# Altium PCB Test_disposable.PcbDoc
Units mm, origin at the board's own origin, x right, y up, seen from the top; angles counter-clockwise.
Board outline 107.92 x 107.82 mm, 2 copper layers (Component Side, Bottom Layer), stack 1.571 mm thick; 10 components, 79 nets, 184 pads, 80 vias.
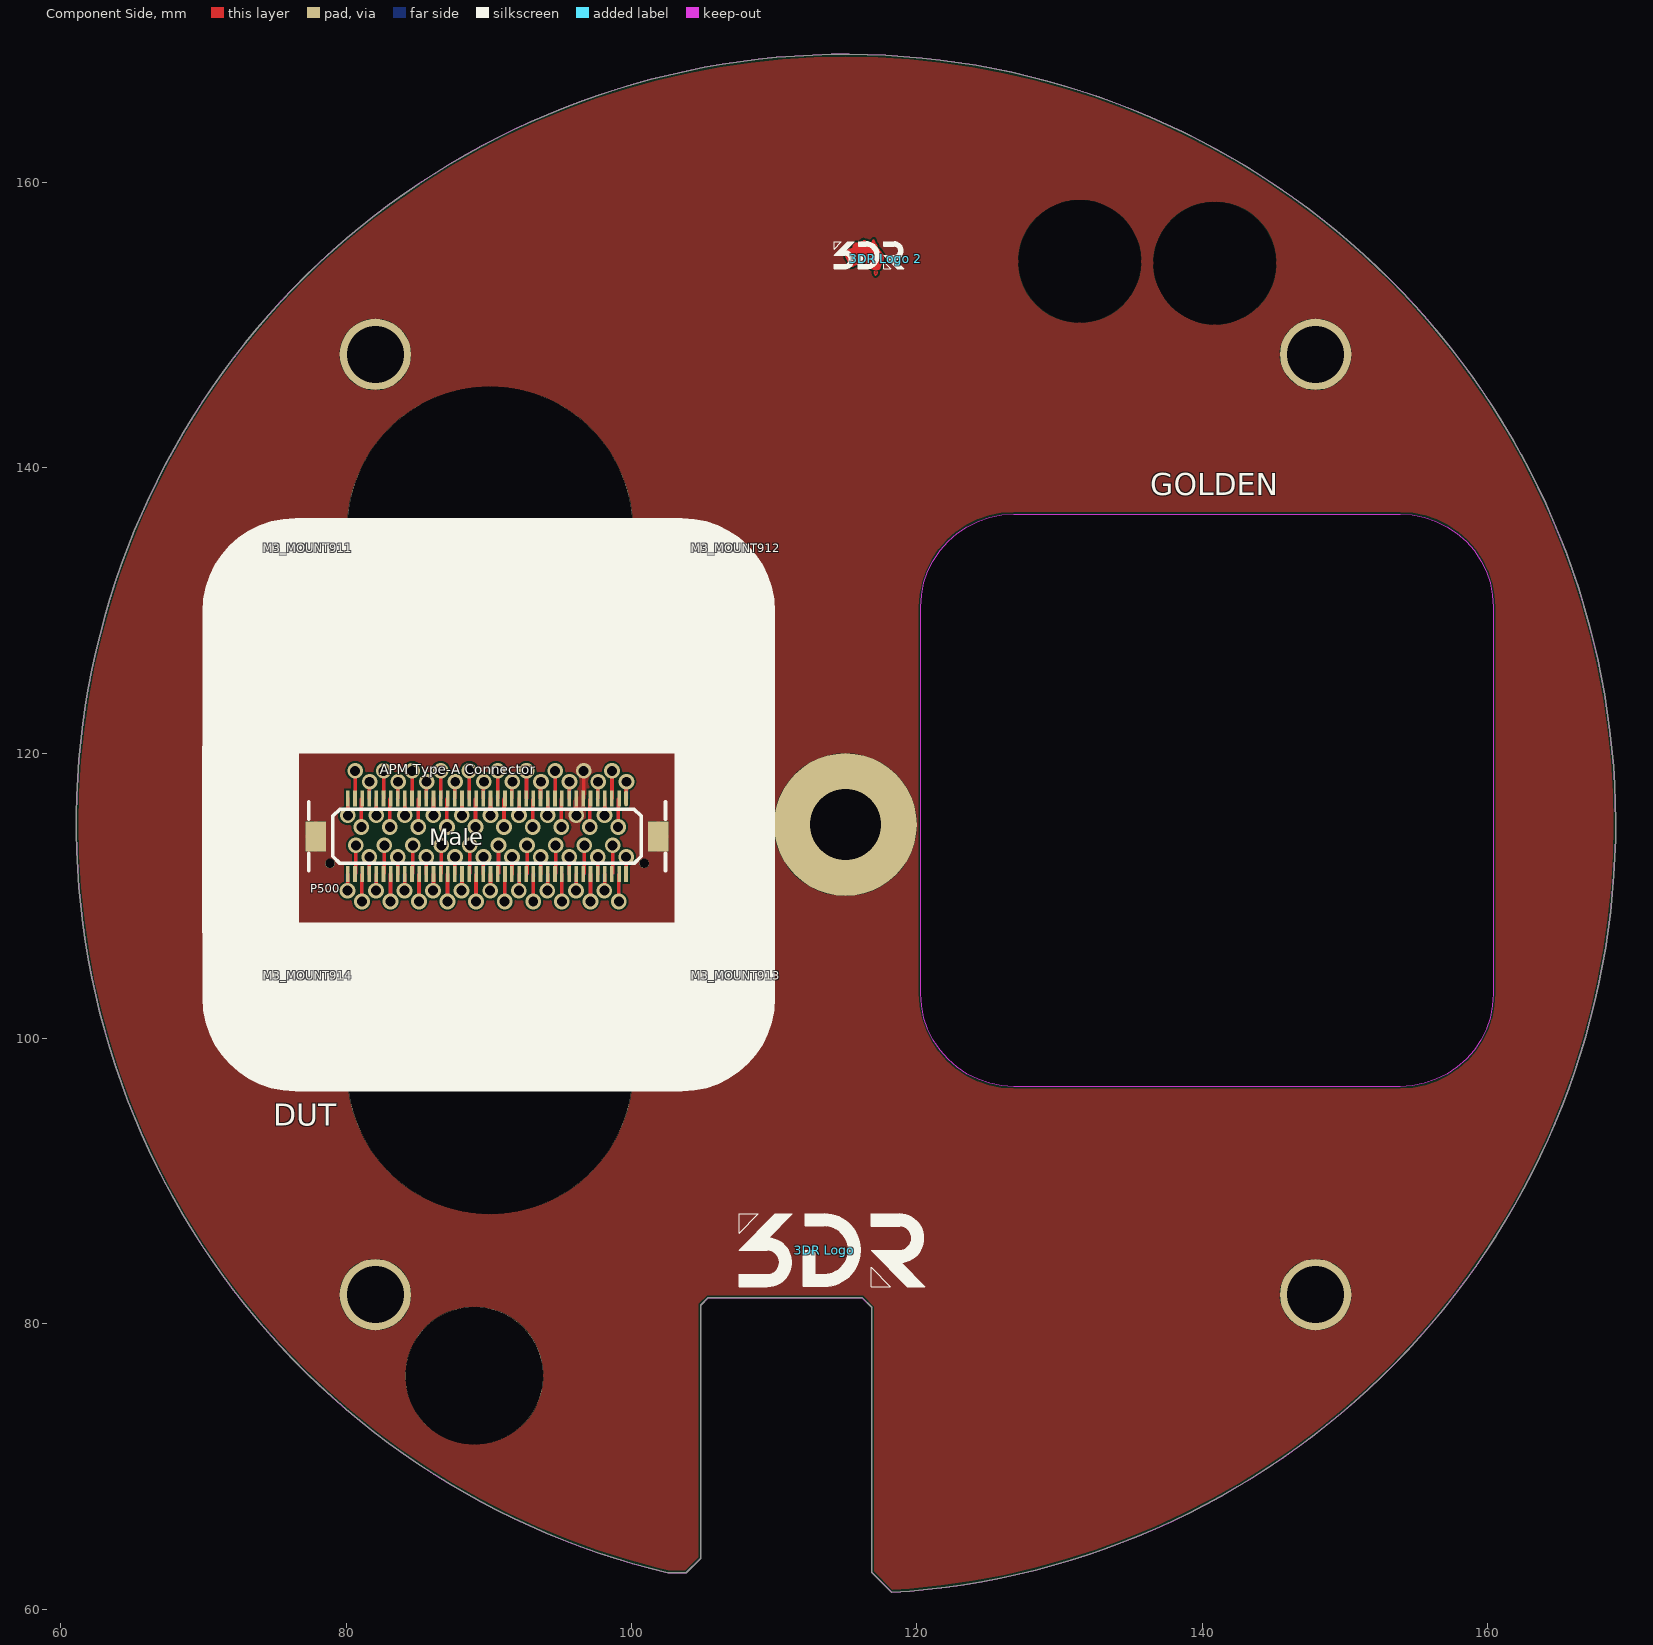
[diagram p0: Component Side view]
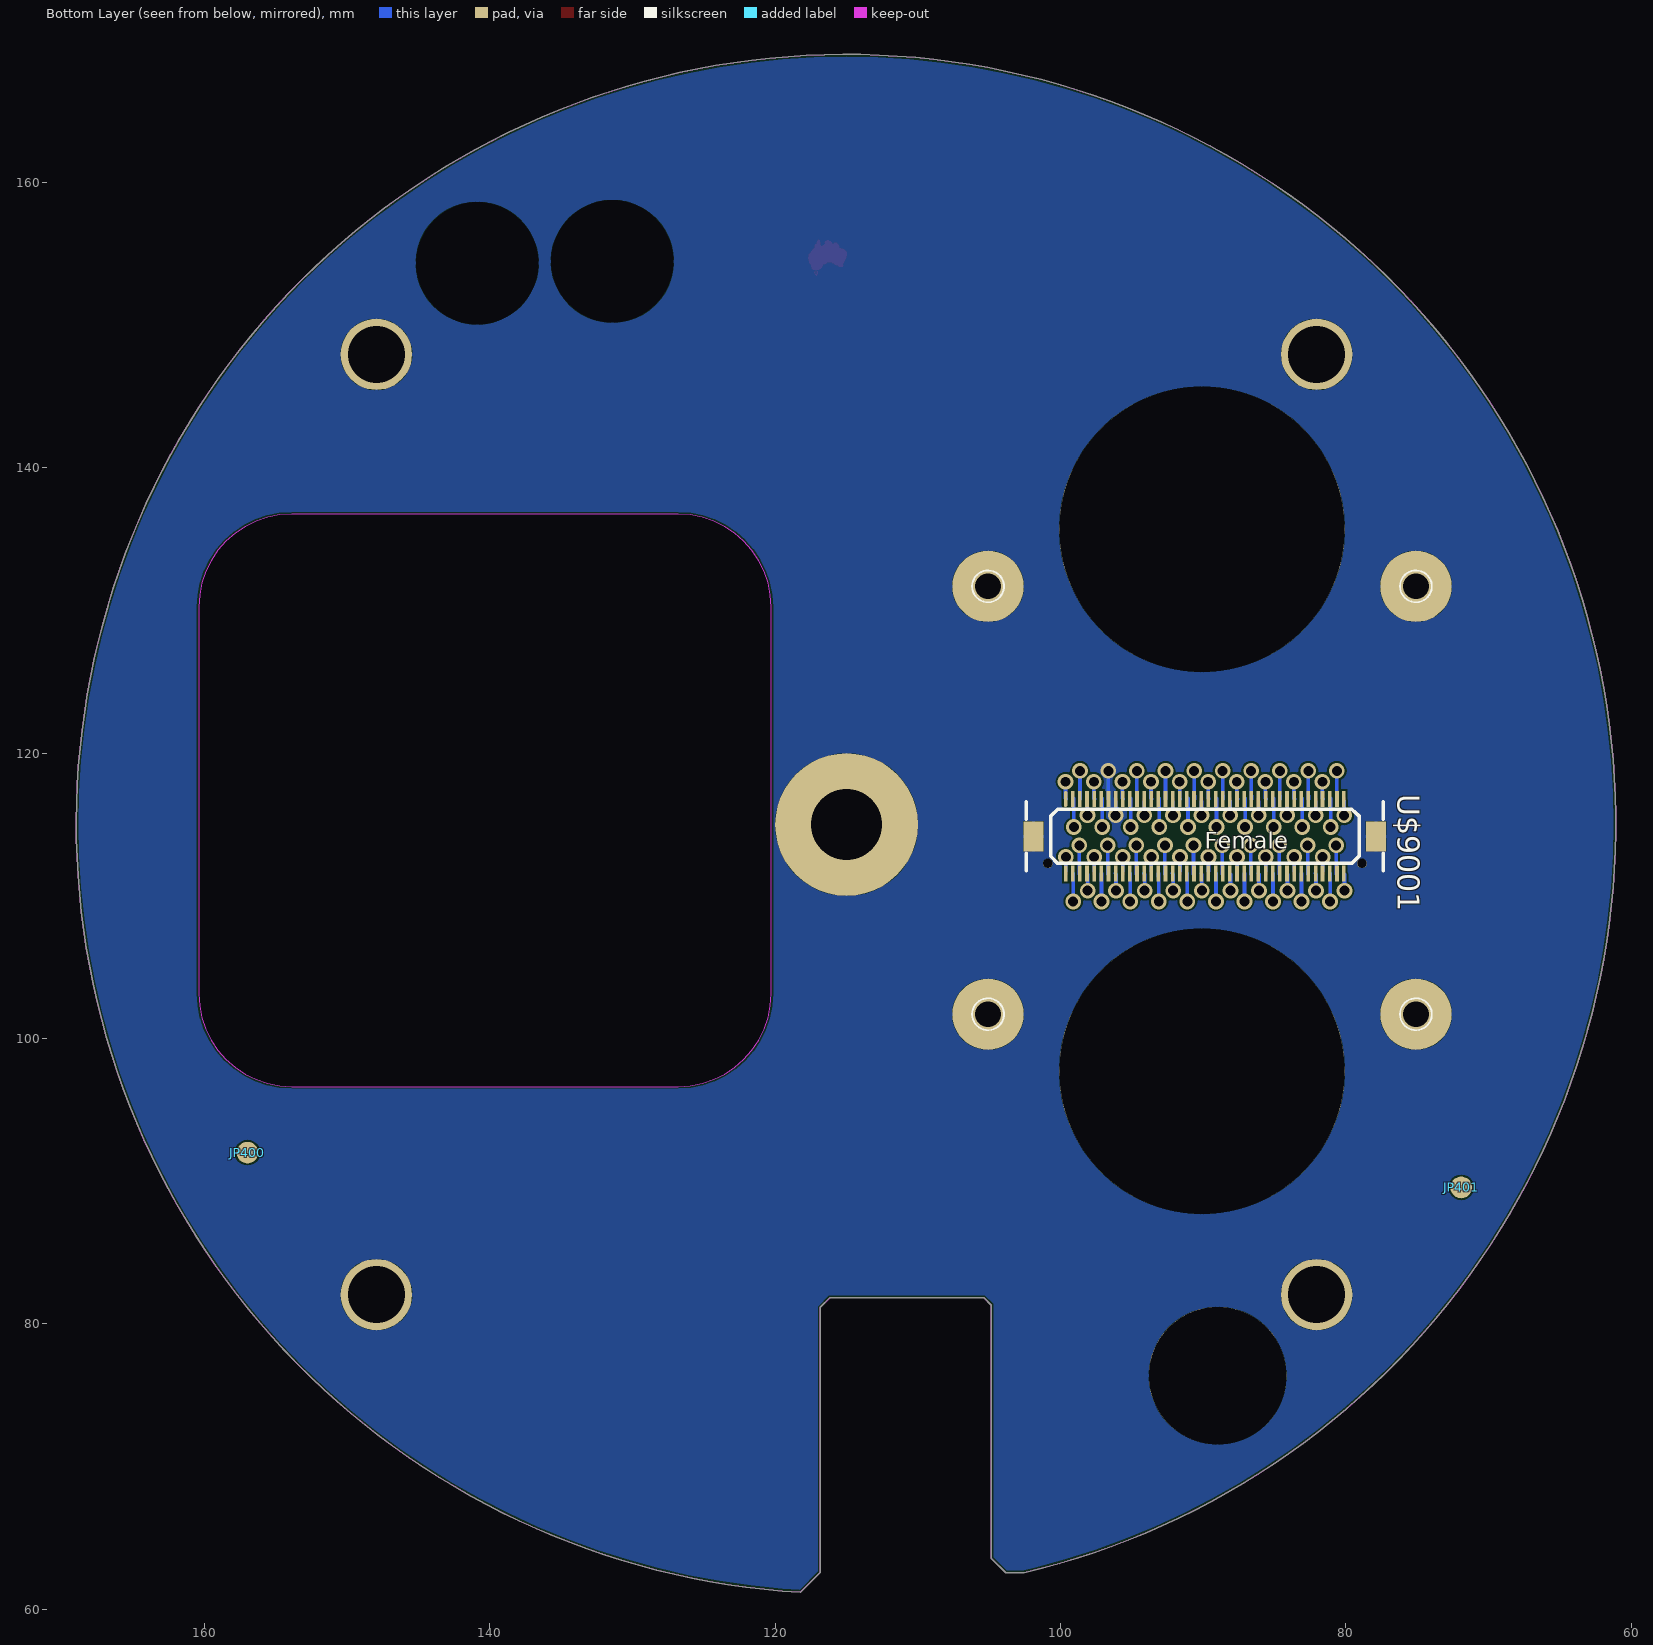
[diagram p1: Bottom Layer view, seen from below]

## Layer stack, top to bottom
Top Solder: solder mask 0.0102, Solder Resist, Dk 3.5
Component Side: signal copper 0.0356
Dielectric 1: core 1.5, FR-4, Dk 4.2
Bottom Layer: signal copper 0.0356
Solder Side: solder mask 0.0102, Solder Resist, Dk 3.5

## Board outline
102.54,62.543 103.844,62.543 104.851,63.551 104.851,81.305 105.385,81.839 116.154,81.839 116.84,81.153 116.84,62.569 118.237,61.172 118.236,61.172 ccw(c115.037,115.037)
cut-out: 120.284,130.249 120.339,131.099 120.506,131.935 120.78,132.743 121.157,133.507 121.63,134.216 122.192,134.856 122.833,135.418 123.542,135.892 124.306,136.269 125.113,136.543 125.949,136.709 126.8,136.765 153.9,136.765 154.75,136.709 155.586,136.543 156.393,136.269 157.158,135.892 157.866,135.418 158.507,134.856 159.069,134.216 159.543,133.507 159.919,132.743 160.193,131.935 160.36,131.099 160.415,130.249 160.415,103.149 160.36,102.299 160.193,101.463 159.919,100.655 159.543,99.891 159.069,99.182 158.507,98.542 157.866,97.98 157.158,97.506 156.393,97.129 155.586,96.855 154.75,96.689 153.9,96.633 126.8,96.633 125.949,96.689 125.113,96.855 124.306,97.129 123.542,97.506 122.833,97.98 122.192,98.542 121.63,99.182 121.157,99.891 120.78,100.655 120.506,101.463 120.339,102.299 120.284,103.149

## Design rules (kind name [scope] priority, off if disabled: settings)
Clearance "Polygon clearance" [InPolygon vs InPolygon] p1: gap=0.3
Clearance Clearance_1 [All] p2: gap=0.127
Clearance mdViaVia [IsVia vs IsVia] p3: gap=0.127
Clearance mdPadVia [IsPad vs IsVia] p4: gap=0.127
Clearance mdPadPad [IsPad vs IsPad] p5: gap=0.127
Clearance mdWireVia [(InLayerClass('Signal Layers') AND IsTrack) vs IsVia] p6: gap=0.127
Clearance mdWirePad [(InLayerClass('Signal Layers') AND IsTrack) vs IsPad] p7: gap=0.127
Clearance mdWireWire [(InLayerClass('Signal Layers') AND IsTrack) vs (InLayerClass('Signal Layers') AND IsTrack)] p8: gap=0.127
ComponentClearance ComponentClearance_1 [(HasFootprint('ed') OR HasFootprint('CON-DF17-80M') OR HasFootprint('DF40-70_RECEPTICAL') OR HasFootprint('PSM') OR HasFootprint('PEM-SMTSO-M1.6-2-ET') OR HasFootprint('HEADER_1X06-FTDI') OR HasFootprint('3DR-WORDMARK-short'))] p1: gap=0 collisioncheckmode=3 verticalgap=0 showdistances=FALSE
ComponentClearance [All] p2 off: gap=0.076 collisioncheckmode=3 verticalgap=0 showdistances=FALSE
DiffPairsRouting [All] p1: maxlimit=0.254 minlimit=0.254 mostfreqgap=0.254 toplayer_minwidth=0.127 toplayer_maxwidth=0.381 toplayer_prefwidth=0.381 bottomlayer_minwidth=0.127 bottomlayer_maxwidth=0.381 bottomlayer_prefwidth=0.381 maxuncoupledlength=12.7
HoleSize [All] p1: absolutevalues=TRUE maxlimit=2540 minlimit=0.2 maxpercent=80.000 minpercent=20.000
HoleToHoleClearance [All] p1: gap=0.203 allowstackedmicrovias=TRUE
MinimumSolderMaskSliver [All] p1 off: minsoldermaskwidth=0.254
PasteMaskExpansion [All] p1: expansion=0.025
PolygonConnect PolygonConnect_1 [InPolygon] p1: connectstyle=Direct reliefconductorwidth=0.254 reliefentries=4 polygonreliefangle="90 Angle" airgapwidth=0.254
PolygonConnect ThermalVias [IsVia] p2: connectstyle=Direct reliefconductorwidth=0.254 reliefentries=4 polygonreliefangle="90 Angle" airgapwidth=0.254
RoutingVias [All] p1: holewidth=0.2 width=0.5 viastyle="Through Hole" minholewidth=0.2 minwidth=0.5 maxholewidth=0.711 maxwidth=1.27
SilkToBoardRegionClearance [All] p1 off:
SilkToSilkClearance [All] p1 off: silktosilkclearance=0.254
SilkToSolderMaskClearance [IsPad] p1 off: minsilkscreentomaskgap=0.254 clearancetoexposedcopper=TRUE
SolderMaskExpansion [All] p1: expansion=0.025
Width [All] p1: maxlimit=1 minlimit=0.15 preferedwidth=0.254
21 further rules are at their usual default settings.

## Components (designator, comment, footprint, x,y, rotation, side; value= is the part's Value field where it differs from the comment)
"3DR Logo" "DO NOT PLACE" 3DR_Small 113.513,85.141 r0 top
"3DR Logo 2" "DO NOT PLACE" 3DR_AU 117.831,154.661 r0 top
JP400 "FIDUCIAL1.5X3" FIDUCIAL-1.5X3 156.997,91.999 r180 bottom
JP401 "FIDUCIAL1.5X3" FIDUCIAL-1.5X3 71.907,89.56 r90 bottom
M3_MOUNT911 "MOUNT-HOLE1.8MM" MOUNT-HOLE1.8 75.083,131.699 r90 top
M3_MOUNT912 "MOUNT-HOLE1.8MM" MOUNT-HOLE1.8 105.08,131.699 r90 top
M3_MOUNT913 "MOUNT-HOLE1.8MM" MOUNT-HOLE1.8 105.08,101.702 r90 top
M3_MOUNT914 "MOUNT-HOLE1.8MM" MOUNT-HOLE1.8 75.083,101.702 r90 top
P500 "CON-DF17-80M" CON-DF17-80M 89.865,114.173 r0 top locked
U$9001 "CON-DF17-80F" CON-DF17-80F 89.889,114.173 r180 bottom

## Footprints (in the part's own frame and the unit in brackets; to place one, negate y for a bottom-side part, rotate by r counter-clockwise, add the part's x,y. Pads: shape width x height; smd on the part's side, far side on the other; paste and mask are expansions set on the pad)
3DR_AU [mm]
  Component Side region: -2.175,1 -2.25,0.925 -2.25,0.825 -2.4,0.675 -2.625,0.675 -2.8,0.5 -2.8,0.175 -2.7,0.075 -2.7,-0.1 -2.525,-0.275 -2.525,-0.425 -2.575,-0.475 -2.525,-0.525 -2.4,-0.525 -2.325,-0.45 -2.225,-0.45 -2.15,-0.375 -2.025,-0.375 -1.85,-0.2 -1.475,-0.2 -1.35,-0.325 -1.325,-0.3 -1.225,-0.3 -1.1,-0.425 -1.1,-0.55 -1.075,-0.55 -0.925,-0.7 -0.85,-0.7 -0.8,-0.75 -0.525,-0.75 -0.4,-0.625 -0.4,-0.425 -0.25,-0.275 -0.25,-0.1 -0.175,-0.025 -0.175,0.175 -0.275,0.275 -0.275,0.35 -0.375,0.45 -0.375,0.5 -0.4,0.5 -0.5,0.6 -0.5,0.625 -0.65,0.775 -0.65,0.95 -0.725,1.025 -0.775,1.025 -0.775,1.15 -0.85,1.225 -0.85,1.3 -0.875,1.3 -0.925,1.25 -0.925,1 -1,0.925 -1,0.825 -1.025,0.8 -1.075,0.85 -1.2,0.85 -1.325,0.975 -1.325,0.975 -1.375,1.025 -1.35,1.05 -1.35,1.175 -1.4,1.225 -1.575,1.225 -1.625,1.175 -1.725,1.175 -1.725,1.15 -1.775,1.1 -1.775,1 -1.8,1 -1.825,0.975 -1.85,1 -1.95,1 -2.025,1.075 -2.125,1.075
  Component Side lines w0.1: -2.825,0.494 -2.818,0.428 -2.815,0.368 -2.812,0.311 -2.807,0.256 -2.8,0.213 -2.789,0.169 -2.773,0.122 -2.751,0.073 -2.773,0.066 -2.618,-0.181 -2.615,-0.209 -2.606,-0.236 -2.594,-0.261 -2.579,-0.286 -2.553,-0.324 -2.527,-0.362 -2.54,-0.414 -2.553,-0.437 -2.564,-0.456 -2.571,-0.471 -2.575,-0.481 -2.576,-0.489 -2.576,-0.496 -2.573,-0.501 -2.567,-0.507 -2.558,-0.512 -2.536,-0.518 -2.509,-0.524 -2.475,-0.531 -2.439,-0.534 -2.407,-0.531 -2.379,-0.522 -2.352,-0.508 -2.326,-0.492 -2.292,-0.469 -2.256,-0.446 -2.216,-0.427 cw(c-1.816,-1.986) -2.008,-0.388 -1.982,-0.323 cw(c-1.007,-2.013) -1.775,-0.22 -1.739,-0.209 -1.697,-0.201 -1.65,-0.195 -1.602,-0.193 -1.553,-0.195 -1.513,-0.201 -1.476,-0.21 -1.442,-0.223 -1.412,-0.241 -1.388,-0.263 -1.37,-0.291 -1.359,-0.316 -1.35,-0.333 -1.344,-0.343 -1.342,-0.345 -1.34,-0.346 -1.338,-0.346 -1.336,-0.346 -1.333,-0.344 -1.331,-0.342 -1.323,-0.333 -1.311,-0.317 -1.294,-0.296 ccw(c-1.322,-0.176) -1.231,-0.258 -1.23,-0.264 -1.231,-0.27 -1.234,-0.284 -1.242,-0.313 -1.247,-0.331 -1.25,-0.348 -1.251,-0.362 -1.25,-0.368 -1.247,-0.372 -1.244,-0.374 -1.241,-0.375 -1.236,-0.375 -1.23,-0.365 -1.222,-0.351 -1.214,-0.337 -1.206,-0.325 -1.199,-0.316 -1.195,-0.313 -1.191,-0.311 -1.188,-0.31 -1.185,-0.31 -1.182,-0.312 -1.18,-0.314 -1.177,-0.32 -1.174,-0.329 -1.172,-0.342 -1.175,-0.356 -1.178,-0.369 -1.18,-0.378 -1.181,-0.386 -1.18,-0.39 -1.18,-0.392 -1.178,-0.395 -1.175,-0.396 -1.172,-0.397 -1.167,-0.398 -1.162,-0.397 -1.154,-0.395 -1.143,-0.392 -1.121,-0.415 -1.106,-0.435 -1.098,-0.455 -1.098,-0.472 -1.103,-0.493 -1.114,-0.518 -1.084,-0.563 -1.052,-0.602 -1.018,-0.634 -0.982,-0.662 -0.944,-0.686 -0.892,-0.716 -0.836,-0.745 -0.777,-0.777 -0.754,-0.764 -0.737,-0.754 -0.723,-0.748 -0.711,-0.746 -0.7,-0.747 -0.689,-0.752 -0.676,-0.76 -0.659,-0.77 -0.638,-0.784 cw(c-0.385,-1.046) -0.44,-0.686 cw(c1.383,-1.062) -0.336,-0.349 ccw(c-0.439,-0.2) -0.258,-0.206 -0.251,-0.165 -0.239,-0.125 -0.225,-0.086 -0.211,-0.047 -0.201,-0.016 -0.194,0.015 -0.192,0.047 -0.194,0.079 -0.201,0.117 -0.209,0.152 -0.217,0.187 -0.226,0.228 -0.233,0.273 -0.266,0.315 -0.299,0.355 -0.328,0.396 -0.348,0.43 -0.364,0.466 -0.375,0.506 -0.396,0.513 -0.412,0.522 -0.424,0.532 -0.433,0.544 -0.441,0.557 -0.45,0.577 -0.462,0.599 -0.479,0.623 -0.499,0.644 -0.523,0.662 -0.548,0.677 -0.579,0.695 -0.608,0.714 -0.615,0.748 -0.621,0.786 -0.627,0.826 -0.634,0.868 -0.644,0.908 -0.654,0.939 -0.668,0.967 -0.685,0.991 -0.701,1.005 -0.719,1.016 -0.74,1.023 -0.764,1.025 ccw(c-2.095,0.858) -0.842,1.336 -0.866,1.319 -0.887,1.296 -0.903,1.267 -0.917,1.235 -0.928,1.197 -0.937,1.157 -0.944,1.115 -0.95,1.071 -0.955,1.028 -0.96,0.988 -0.965,0.952 -0.971,0.921 cw(c-1.47,1.161) -1.036,0.818 -1.069,0.821 -1.103,0.831 -1.137,0.846 -1.172,0.865 -1.207,0.888 -1.241,0.913 -1.28,0.943 -1.318,0.973 -1.353,1.001 -1.386,1.025 -1.354,1.088 -1.363,1.093 -1.369,1.099 -1.372,1.104 -1.374,1.111 -1.374,1.118 -1.371,1.124 -1.367,1.13 -1.358,1.136 -1.347,1.14 -1.334,1.142 -1.326,1.167 -1.321,1.187 -1.32,1.201 -1.321,1.206 -1.323,1.209 -1.327,1.211 -1.331,1.213 -1.337,1.213 -1.344,1.213 -1.362,1.211 -1.386,1.206 ccw(c-1.915,0.11) -1.593,1.284 -1.594,1.278 -1.593,1.273 -1.591,1.27 -1.588,1.267 -1.58,1.263 -1.57,1.26 -1.56,1.256 -1.551,1.249 -1.546,1.242 -1.543,1.232 -1.542,1.219 -1.554,1.218 -1.572,1.216 -1.594,1.214 -1.618,1.211 -1.644,1.207 -1.668,1.201 -1.691,1.194 -1.712,1.186 -1.728,1.176 -1.737,1.168 -1.742,1.158 -1.743,1.147 -1.74,1.134 -1.756,1.127 -1.768,1.119 -1.776,1.11 -1.781,1.095 -1.78,1.078 -1.776,1.06 -1.769,1.041 -1.764,1.02 -1.762,0.999 -1.801,0.988 -1.834,0.982 -1.864,0.981 -1.891,0.986 -1.916,0.995 -1.947,1.014 -1.977,1.042 -2.008,1.077 -2.033,1.081 -2.059,1.083 -2.086,1.083 -2.11,1.078 -2.132,1.069 -2.149,1.053 -2.157,1.039 -2.162,1.021 -2.164,0.999 -2.177,0.989 -2.187,0.98 -2.193,0.973 -2.197,0.97 -2.201,0.968 -2.204,0.967 -2.206,0.968 -2.209,0.969 -2.217,0.975 -2.229,0.986 -2.244,0.955 -2.256,0.92 -2.267,0.884 -2.277,0.847 -2.289,0.811 -2.301,0.784 -2.316,0.759 -2.334,0.736 -2.356,0.717 -2.384,0.701 -2.412,0.692 -2.441,0.688 -2.471,0.686 -2.495,0.685 -2.518,0.681 -2.54,0.675 -2.568,0.661 -2.593,0.645 -2.617,0.63 -2.637,0.62 -2.658,0.613 -2.682,0.61 -2.706,0.578 -2.728,0.549 -2.75,0.524 -2.77,0.509 -2.795,0.499 -2.825,0.494 ; -0.804,-0.956 -0.804,-0.899 -0.785,-0.904 -0.703,-0.942 -0.599,-0.921 -0.594,-0.934 -0.599,-1.008 -0.642,-1.082 -0.664,-1.065 -0.712,-1.139 -0.73,-1.135 -0.786,-1.051 -0.795,-1.004 -0.787,-0.997 -0.804,-0.956
  silkscreen extent -3.62,-0.71 1.24,1.19
3DR_Small [mm]
  silkscreen extent -5.97,-2.53 7.04,2.57
CON-DF17-80F [mil]
  rrect100% 10x44 smd: 1(-383.86,103)
  rect 10x44 smd: 2(-383.86,-102.36) 3(-364.17,103) 4(-364.17,-102.36) 5(-344.49,103) 6(-344.49,-102.36) 7(-324.8,103) 8(-324.8,-102.36) 9(-305.12,103) 10(-305.12,-102.36) 11(-285.43,103) 12(-285.43,-102.36) 13(-265.75,103) 14(-265.75,-102.36) 15(-246.06,103) 16(-246.06,-102.36) 17(-226.38,103) 18(-226.38,-102.36) 19(-206.69,103) 20(-206.69,-102.36) 21(-187.01,103) 22(-187.01,-102.36) 23(-167.32,103) 24(-167.32,-102.36) 25(-147.64,103) 26(-147.64,-102.36) 27(-127.95,103) 28(-127.95,-102.36) 29(-108.27,103) 30(-108.27,-102.36) 31(-88.58,103) 32(-88.58,-102.36) 33(-68.9,103) 34(-68.9,-102.36) 35(-49.21,103) 36(-49.21,-102.36) 37(-29.53,103) 38(-29.53,-102.36) 39(-9.84,103) 40(-9.84,-102.36) 41(10,103) 42(10,-102.36) 43(30,103) 44(30,-102.36) 45(50,103) 46(50,-102.36) 47(69,103) 48(69,-102.36) 49(89,103) 50(89,-102.36) 51(109,103) 52(109,-102.36) 53(128,103) 54(128,-102.36) 55(148,103) 56(148,-102.36) 57(168,103) 58(168,-102.36) 59(188,103) 60(188,-102.36) 61(207,103) 62(207,-102.36) 63(227,103) 64(227,-102.36) 65(247,103) 66(247,-102.36) 67(266,103) 68(266,-102.36) 69(286,103) 70(286,-102.36) 71(306,103) 72(306,-102.36) 73(325,103) 74(325,-102.36) 75(345,103) 76(345,-102.36) 77(365,103) 78(365,-102.36) 79(384,103) 80(384,-102.36)
  rect 56x83 smd: GND(-472.44,0) GND(473,0)
  round 26 hole 26 unplated: hole-1(-433.07,-74.8) hole-2(434,-74.8)
  silkscreen extent -492,-94 493,95, body extent -492,-112 492,112, height 118
CON-DF17-80M [mil]
  rrect100% 10x44 smd: 1(384,105)
  rect 10x44 smd: 2(384,-104.33) 3(365,105) 4(365,-104.33) 5(345,105) 6(345,-104.33) 7(325,105) 8(325,-104.33) 9(306,105) 10(306,-104.33) 11(286,105) 12(286,-104.33) 13(266,105) 14(266,-104.33) 15(247,105) 16(247,-104.33) 17(227,105) 18(227,-104.33) 19(207,105) 20(207,-104.33) 21(188,105) 22(188,-104.33) 23(168,105) 24(168,-104.33) 25(148,105) 26(148,-104.33) 27(128,105) 28(128,-104.33) 29(109,105) 30(109,-104.33) 31(89,105) 32(89,-104.33) 33(69,105) 34(69,-104.33) 35(50,105) 36(50,-104.33) 37(30,105) 38(30,-104.33) 39(10,105) 40(10,-104.33) 41(-9.84,105) 42(-9.84,-104.33) 43(-29.53,105) 44(-29.53,-104.33) 45(-49.21,105) 46(-49.21,-104.33) 47(-68.9,105) 48(-68.9,-104.33) 49(-88.58,105) 50(-88.58,-104.33) 51(-108.27,105) 52(-108.27,-104.33) 53(-127.95,105) 54(-127.95,-104.33) 55(-147.64,105) 56(-147.64,-104.33) 57(-167.32,105) 58(-167.32,-104.33) 59(-187.01,105) 60(-187.01,-104.33) 61(-206.69,105) 62(-206.69,-104.33) 63(-226.38,105) 64(-226.38,-104.33) 65(-246.06,105) 66(-246.06,-104.33) 67(-265.75,105) 68(-265.75,-104.33) 69(-285.43,105) 70(-285.43,-104.33) 71(-305.12,105) 72(-305.12,-104.33) 73(-324.8,105) 74(-324.8,-104.33) 75(-344.49,105) 76(-344.49,-104.33) 77(-364.17,105) 78(-364.17,-104.33) 79(-383.86,105) 80(-383.86,-104.33)
  rect 56x83 smd: GND(-472.44,0) GND(473,0)
  round 26 hole 26: hole-1(-433.07,-74.8) hole-2(434,-74.8)
  silkscreen extent -492,-94 493,95, body extent -492,-109 492,115, height 124
FIDUCIAL-1.5X3 [mil]
  rrect100% 60x60 smd paste-78.74: 1(0,0)
MOUNT-HOLE1.8 [mil]
  round 87 / inner round 87 / far side round 196.85 hole 71: 1(0,0)
  silkscreen extent -44,-44 44,44

## Part data
"3DR Logo" "3DR Logo 2": library part 3DR_LOGO
JP400 JP401: "<b>Fiducial Alignment Points</b> / Various fiducial points for machine vision alignment."
P500: "Connector, Header, 80Pos, .5MM, DUAL, SMD, Au"
U$9001: "CONN RECEPT 80POS .5MM SMD W/FIT"

## Free pads (board coordinates)
  round 5 hole 4: 0(82.039,147.961) 0(82.039,82.039) 0(147.961,82.039) 0(147.961,147.961)
  round 9.641 hole 9.641: 1(88.982,76.369)
  round 20 hole 20: 1(90.081,97.702) 1(90.081,135.699)
  round 10 hole 5: 1(115,115)
  round 1.524 hole 8.6: 2(131.42,154.483) 3(140.894,154.356)

## Via types
v1: diameter 1.1, hole 0.7, Component Side to Bottom Layer, tented both sides, 80 vias

## Nets (pads, with @x,y where several pads share a name; then routed paths per layer and width w, separated by ;. In a path a pad name is that pad's centre, name@x,y a point inside that pad or via, vN(x,y) a via of type N, cw(c..) or ccw(c..) an arc to the next point about the centre after c; other vN are vias at no path point)
GND: M3_MOUNT911.1 M3_MOUNT912.1 M3_MOUNT913.1 M3_MOUNT914.1 P500.13 P500.15 P500.GND P500.hole-1 P500.hole-2 pad.0 pad.1 pad.2 pad.3 U$9001.13 U$9001.15 U$9001.GND U$9001.hole-1 U$9001.hole-2 | length 6.3
  Component Side w0.254: v1@96.138,115.648 P500.15 ; P500.13@96.651,116.853 v1(96.651,118.762)
  Bottom Layer w0.254: v1(96.132,115.642) U$9001.15@96.132,116.632 ; U$9001.13@96.626,116.792 U$9001.13@96.626,117.003 ; U$9001.13@96.651,116.792 v1(96.651,118.762)
NetP500_1: P500.1 U$9001.1 | length 2.4
  Component Side w0.254: P500.1 v1@99.619,117.971
  Bottom Layer w0.254: U$9001.1@99.599,116.79 99.648,116.839 v1(99.648,118)
NetP500_2: P500.2 U$9001.2 | length 2.2
  Component Side w0.254: P500.2@99.62,111.523 v1@99.62,112.715
  Bottom Layer w0.254: U$9001.2@99.626,111.731 v1(99.626,112.721)
NetP500_3: P500.3 U$9001.3 | length 4.7
  Component Side w0.254: v1(99.064,114.825) P500.3@99.064,116.785
  Bottom Layer w0.254: U$9001.3@99.064,116.847 99.064,116.79 v1(99.064,114.825) ; v1(99.064,114.825) 99.064,114.47 v1(99.064,114.825)
NetP500_4: P500.4 U$9001.4 | length 4.1
  Component Side w0.254: v1(99.107,109.601) P500.4@99.107,111.51
  Bottom Layer w0.254: v1(99.107,109.601) U$9001.4@99.107,111.572 ; U$9001.4@99.133,111.361 U$9001.4@99.133,111.572
NetP500_5: P500.5 U$9001.5 | length 4.1
  Component Side w0.254: P500.5@98.632,116.853 v1(98.632,118.762)
  Bottom Layer w0.254: U$9001.5@98.607,116.792 U$9001.5@98.607,117.003 ; U$9001.5@98.632,116.792 v1(98.632,118.762)
NetP500_6: P500.6 U$9001.6 | length 4.7
  Component Side w0.254: P500.6@98.675,111.578 v1(98.675,113.538)
  Bottom Layer w0.254: U$9001.6@98.675,111.517 98.675,111.573 v1(98.675,113.538) ; v1(98.675,113.538) 98.675,113.894 v1(98.675,113.538)
NetP500_7: P500.7 U$9001.7 | length 2.2
  Component Side w0.254: v1@98.119,115.648 P500.7
  Bottom Layer w0.254: v1(98.113,115.642) U$9001.7@98.113,116.632
NetP500_8: P500.8 U$9001.8 | length 2.4
  Component Side w0.254: v1@98.12,110.392 P500.8
  Bottom Layer w0.254: v1(98.091,110.363) 98.091,111.524 U$9001.8@98.14,111.573
NetP500_9: P500.9 U$9001.9 | length 2.4
  Component Side w0.254: P500.9 v1@97.638,117.971
  Bottom Layer w0.254: U$9001.9@97.618,116.79 97.667,116.839 v1(97.667,118)
NetP500_10: P500.10 U$9001.10 | length 2.2
  Component Side w0.254: P500.10@97.639,111.523 v1@97.639,112.715
  Bottom Layer w0.254: U$9001.10@97.645,111.731 v1(97.645,112.721)
NetP500_11: P500.11 U$9001.11 | length 4.7
  Component Side w0.254: v1(97.083,114.825) P500.11@97.083,116.785
  Bottom Layer w0.254: U$9001.11@97.083,116.847 97.083,116.79 v1(97.083,114.825) ; v1(97.083,114.825) 97.083,114.47 v1(97.083,114.825)
NetP500_12: P500.12 U$9001.12 | length 4.1
  Component Side w0.254: v1(97.126,109.601) P500.12@97.126,111.51
  Bottom Layer w0.254: v1(97.126,109.601) U$9001.12@97.126,111.572 ; U$9001.12@97.151,111.361 U$9001.12@97.151,111.572
NetP500_14: P500.14 U$9001.14 | length 4.7
  Component Side w0.254: P500.14@96.694,111.578 v1(96.694,113.538)
  Bottom Layer w0.254: U$9001.14@96.694,111.517 96.694,111.573 v1(96.694,113.538) ; v1(96.694,113.538) 96.694,113.894 v1(96.694,113.538)
NetP500_16: P500.16 U$9001.16 | length 2.4
  Component Side w0.254: v1@96.139,110.392 P500.16
  Bottom Layer w0.254: v1(96.11,110.363) 96.11,111.524 U$9001.16@96.159,111.573
NetP500_17: P500.17 U$9001.17 | length 2.4
  Component Side w0.254: P500.17 v1@95.631,117.971
  Bottom Layer w0.254: U$9001.17@95.611,116.79 95.66,116.839 v1(95.66,118)
NetP500_18: P500.18 U$9001.18 | length 2.2
  Component Side w0.254: P500.18@95.633,111.523 v1@95.633,112.715
  Bottom Layer w0.254: U$9001.18@95.638,111.731 v1(95.638,112.721)
NetP500_19: P500.19 U$9001.19 | length 4.7
  Component Side w0.254: v1(95.076,114.825) P500.19@95.076,116.785
  Bottom Layer w0.254: U$9001.19@95.076,116.847 95.076,116.79 v1(95.076,114.825) ; v1(95.076,114.825) 95.076,114.47 v1(95.076,114.825)
NetP500_20: P500.20 U$9001.20 | length 4.1
  Component Side w0.254: v1(95.119,109.601) P500.20@95.119,111.51
  Bottom Layer w0.254: v1(95.119,109.601) U$9001.20@95.119,111.572 ; U$9001.20@95.145,111.361 U$9001.20@95.145,111.572
NetP500_21: P500.21 U$9001.21 | length 4.1
  Component Side w0.254: P500.21@94.644,116.853 v1(94.644,118.762)
  Bottom Layer w0.254: U$9001.21@94.619,116.792 U$9001.21@94.619,117.003 ; U$9001.21@94.644,116.792 v1(94.644,118.762)
NetP500_22: P500.22 U$9001.22 | length 4.7
  Component Side w0.254: P500.22@94.688,111.578 v1(94.688,113.538)
  Bottom Layer w0.254: U$9001.22@94.688,111.517 94.688,111.573 v1(94.688,113.538) ; v1(94.688,113.538) 94.688,113.894 v1(94.688,113.538)
NetP500_23: P500.23 U$9001.23 | length 2.2
  Component Side w0.254: v1@94.131,115.648 P500.23
  Bottom Layer w0.254: v1(94.125,115.642) U$9001.23@94.125,116.632
NetP500_24: P500.24 U$9001.24 | length 2.4
  Component Side w0.254: v1@94.133,110.392 P500.24
  Bottom Layer w0.254: v1(94.103,110.363) 94.103,111.524 U$9001.24@94.153,111.573
NetP500_25: P500.25 U$9001.25 | length 2.4
  Component Side w0.254: P500.25 v1@93.625,117.971
  Bottom Layer w0.254: U$9001.25@93.605,116.79 93.654,116.839 v1(93.654,118)
NetP500_26: P500.26 U$9001.26 | length 2.2
  Component Side w0.254: P500.26@93.626,111.523 v1@93.626,112.715
  Bottom Layer w0.254: U$9001.26@93.632,111.731 v1(93.632,112.721)
NetP500_27: P500.27 U$9001.27 | length 4.7
  Component Side w0.254: v1(93.07,114.825) P500.27@93.07,116.785
  Bottom Layer w0.254: U$9001.27@93.07,116.847 93.07,116.79 v1(93.07,114.825) ; v1(93.07,114.825) 93.07,114.47 v1(93.07,114.825)
NetP500_28: P500.28 U$9001.28 | length 4.1
  Component Side w0.254: v1(93.113,109.601) P500.28@93.113,111.51
  Bottom Layer w0.254: v1(93.113,109.601) U$9001.28@93.113,111.572 ; U$9001.28@93.138,111.361 U$9001.28
NetP500_29: P500.29 U$9001.29 | length 4.1
  Component Side w0.254: P500.29@92.638,116.853 v1(92.638,118.762)
  Bottom Layer w0.254: U$9001.29@92.612,116.792 U$9001.29@92.612,117.003 ; U$9001.29@92.638,116.792 v1(92.638,118.762)
NetP500_30: P500.30 U$9001.30 | length 4.7
  Component Side w0.254: P500.30@92.681,111.578 v1(92.681,113.538)
  Bottom Layer w0.254: U$9001.30@92.681,111.517 92.681,111.573 v1(92.681,113.538) ; v1(92.681,113.538) 92.681,113.894 v1(92.681,113.538)
NetP500_31: P500.31 U$9001.31 | length 2.2
  Component Side w0.254: v1@92.125,115.648 P500.31
  Bottom Layer w0.254: v1(92.119,115.642) U$9001.31@92.119,116.632
NetP500_32: P500.32 U$9001.32 | length 2.4
  Component Side w0.254: v1@92.126,110.392 P500.32
  Bottom Layer w0.254: v1(92.097,110.363) 92.097,111.524 U$9001.32@92.146,111.573
NetP500_33: P500.33 U$9001.33 | length 2.4
  Component Side w0.254: P500.33 v1@91.618,117.971
  Bottom Layer w0.254: U$9001.33@91.598,116.79 91.647,116.839 v1(91.647,118)
NetP500_34: P500.34 U$9001.34 | length 2.2
  Component Side w0.254: P500.34@91.619,111.523 v1@91.619,112.715
  Bottom Layer w0.254: U$9001.34@91.625,111.731 v1(91.625,112.721)
NetP500_35: P500.35 U$9001.35 | length 4.7
  Component Side w0.254: v1(91.063,114.825) P500.35@91.063,116.785
  Bottom Layer w0.254: U$9001.35@91.063,116.847 91.063,116.79 v1(91.063,114.825) ; v1(91.063,114.825) 91.063,114.47 v1(91.063,114.825)
NetP500_36: P500.36 U$9001.36 | length 4.1
  Component Side w0.254: v1(91.106,109.601) P500.36@91.106,111.51
  Bottom Layer w0.254: v1(91.106,109.601) U$9001.36@91.106,111.572 ; U$9001.36@91.132,111.361 U$9001.36@91.132,111.572
NetP500_37: P500.37 U$9001.37 | length 4.1
  Component Side w0.254: P500.37@90.631,116.853 v1(90.631,118.762)
  Bottom Layer w0.254: U$9001.37@90.606,116.792 U$9001.37@90.606,117.003 ; U$9001.37@90.631,116.792 v1(90.631,118.762)
NetP500_38: P500.38 U$9001.38 | length 4.7
  Component Side w0.254: P500.38@90.674,111.578 v1(90.674,113.538)
  Bottom Layer w0.254: U$9001.38@90.674,111.517 90.674,111.573 v1(90.674,113.538) ; v1(90.674,113.538) 90.674,113.894 v1(90.674,113.538)
NetP500_39: P500.39 U$9001.39 | length 2.2
  Component Side w0.254: v1@90.118,115.648 P500.39
  Bottom Layer w0.254: v1(90.112,115.642) U$9001.39@90.112,116.632
NetP500_40: P500.40 U$9001.40 | length 2.4
  Component Side w0.254: v1@90.119,110.392 P500.40
  Bottom Layer w0.254: v1(90.09,110.363) 90.09,111.524 U$9001.40
NetP500_41: P500.41 U$9001.41 | length 2.4
  Component Side w0.254: P500.41 v1@89.615,117.971
  Bottom Layer w0.254: U$9001.41@89.595,116.79 89.645,116.839 v1(89.645,118)
NetP500_42: P500.42 U$9001.42 | length 2.2
  Component Side w0.254: P500.42 v1@89.615,112.715
  Bottom Layer w0.254: U$9001.42@89.621,111.731 v1(89.621,112.721)
NetP500_43: P500.43 U$9001.43 | length 4.7
  Component Side w0.254: v1(89.06,114.825) P500.43@89.06,116.785
  Bottom Layer w0.254: U$9001.43@89.06,116.847 89.06,116.79 v1(89.06,114.825) ; v1(89.06,114.825) 89.06,114.47 v1(89.06,114.825)
NetP500_44: P500.44 U$9001.44 | length 4.1
  Component Side w0.254: v1(89.102,109.601) P500.44@89.102,111.51
  Bottom Layer w0.254: v1(89.102,109.601) U$9001.44@89.102,111.572 ; U$9001.44@89.128,111.361 U$9001.44@89.128,111.572
NetP500_45: P500.45 U$9001.45 | length 4.1
  Component Side w0.254: P500.45@88.629,116.853 v1(88.629,118.762)
  Bottom Layer w0.254: U$9001.45@88.603,116.792 U$9001.45@88.603,117.003 ; U$9001.45@88.629,116.792 v1(88.629,118.762)
NetP500_46: P500.46 U$9001.46 | length 4.7
  Component Side w0.254: P500.46@88.67,111.578 v1(88.67,113.538)
  Bottom Layer w0.254: U$9001.46@88.67,111.517 88.67,111.573 v1(88.67,113.538) ; v1(88.67,113.538) 88.67,113.894 v1(88.67,113.538)
NetP500_47: P500.47 U$9001.47 | length 2.2
  Component Side w0.254: v1@88.115,115.648 P500.47
  Bottom Layer w0.254: v1(88.11,115.642) U$9001.47@88.11,116.632
NetP500_48: P500.48 U$9001.48 | length 2.4
  Component Side w0.254: v1@88.115,110.392 P500.48
  Bottom Layer w0.254: v1(88.086,110.363) 88.086,111.524 U$9001.48
NetP500_49: P500.49 U$9001.49 | length 2.4
  Component Side w0.254: P500.49 v1@87.615,117.971
  Bottom Layer w0.254: U$9001.49@87.595,116.79 87.645,116.839 v1(87.645,118)
NetP500_50: P500.50 U$9001.50 | length 2.2
  Component Side w0.254: P500.50 v1@87.615,112.715
  Bottom Layer w0.254: U$9001.50@87.621,111.731 v1(87.621,112.721)
NetP500_51: P500.51 U$9001.51 | length 4.7
  Component Side w0.254: v1(87.06,114.825) P500.51@87.06,116.785
  Bottom Layer w0.254: U$9001.51@87.06,116.847 87.06,116.79 v1(87.06,114.825) ; v1(87.06,114.825) 87.06,114.47 v1(87.06,114.825)
NetP500_52: P500.52 U$9001.52 | length 4.1
  Component Side w0.254: v1(87.102,109.601) P500.52@87.102,111.51
  Bottom Layer w0.254: v1(87.102,109.601) U$9001.52@87.102,111.572 ; U$9001.52@87.128,111.361 U$9001.52@87.128,111.572
NetP500_53: P500.53 U$9001.53 | length 4.1
  Component Side w0.254: P500.53@86.629,116.853 v1(86.629,118.762)
  Bottom Layer w0.254: U$9001.53@86.603,116.792 U$9001.53@86.603,117.003 ; U$9001.53@86.629,116.792 v1(86.629,118.762)
NetP500_54: P500.54 U$9001.54 | length 4.7
  Component Side w0.254: P500.54@86.67,111.578 v1(86.67,113.538)
  Bottom Layer w0.254: U$9001.54@86.67,111.517 86.67,111.573 v1(86.67,113.538) ; v1(86.67,113.538) 86.67,113.894 v1(86.67,113.538)
NetP500_55: P500.55 U$9001.55 | length 2.2
  Component Side w0.254: v1@86.115,115.648 P500.55
  Bottom Layer w0.254: v1(86.11,115.642) U$9001.55@86.11,116.632
NetP500_56: P500.56 U$9001.56 | length 2.4
  Component Side w0.254: v1@86.115,110.392 P500.56
  Bottom Layer w0.254: v1(86.086,110.363) 86.086,111.524 U$9001.56@86.135,111.573
NetP500_57: P500.57 U$9001.57 | length 2.4
  Component Side w0.254: P500.57 v1@85.615,117.971
  Bottom Layer w0.254: U$9001.57@85.595,116.79 85.645,116.839 v1(85.645,118)
NetP500_58: P500.58 U$9001.58 | length 2.2
  Component Side w0.254: P500.58 v1@85.615,112.715
  Bottom Layer w0.254: U$9001.58@85.621,111.731 v1(85.621,112.721)
NetP500_59: P500.59 U$9001.59 | length 4.7
  Component Side w0.254: v1(85.06,114.825) P500.59@85.06,116.785
  Bottom Layer w0.254: U$9001.59@85.06,116.847 85.06,116.79 v1(85.06,114.825) ; v1(85.06,114.825) 85.06,114.47 v1(85.06,114.825)
NetP500_60: P500.60 U$9001.60 | length 4.1
  Component Side w0.254: v1(85.102,109.601) P500.60@85.102,111.51
  Bottom Layer w0.254: v1(85.102,109.601) U$9001.60@85.102,111.572 ; U$9001.60@85.128,111.361 U$9001.60@85.128,111.572
NetP500_61: P500.61 U$9001.61 | length 4.1
  Component Side w0.254: P500.61@84.629,116.853 v1(84.629,118.762)
  Bottom Layer w0.254: U$9001.61@84.603,116.792 U$9001.61@84.603,117.003 ; U$9001.61@84.629,116.792 v1(84.629,118.762)
NetP500_62: P500.62 U$9001.62 | length 4.7
  Component Side w0.254: P500.62@84.67,111.578 v1(84.67,113.538)
  Bottom Layer w0.254: U$9001.62@84.67,111.517 84.67,111.573 v1(84.67,113.538) ; v1(84.67,113.538) 84.67,113.894 v1(84.67,113.538)
NetP500_63: P500.63 U$9001.63 | length 2.2
  Component Side w0.254: v1@84.115,115.648 P500.63
  Bottom Layer w0.254: v1(84.11,115.642) U$9001.63@84.11,116.632
NetP500_64: P500.64 U$9001.64 | length 2.4
  Component Side w0.254: v1@84.115,110.392 P500.64
  Bottom Layer w0.254: v1(84.086,110.363) 84.086,111.524 U$9001.64@84.135,111.573
NetP500_65: P500.65 U$9001.65 | length 2.4
  Component Side w0.254: P500.65 v1@83.615,117.971
  Bottom Layer w0.254: U$9001.65@83.595,116.79 83.645,116.839 v1(83.645,118)
NetP500_66: P500.66 U$9001.66 | length 2.2
  Component Side w0.254: P500.66 v1@83.615,112.715
  Bottom Layer w0.254: U$9001.66@83.621,111.731 v1(83.621,112.721)
NetP500_67: P500.67 U$9001.67 | length 4.7
  Component Side w0.254: v1(83.06,114.825) P500.67@83.06,116.785
  Bottom Layer w0.254: U$9001.67@83.06,116.847 83.06,116.79 v1(83.06,114.825) ; v1(83.06,114.825) 83.06,114.47 v1(83.06,114.825)
NetP500_68: P500.68 U$9001.68 | length 4.1
  Component Side w0.254: v1(83.102,109.601) P500.68@83.102,111.51
  Bottom Layer w0.254: v1(83.102,109.601) U$9001.68@83.102,111.572 ; U$9001.68@83.128,111.361 U$9001.68@83.128,111.572
NetP500_69: P500.69 U$9001.69 | length 4.1
  Component Side w0.254: P500.69@82.629,116.853 v1(82.629,118.762)
  Bottom Layer w0.254: U$9001.69@82.603,116.792 U$9001.69@82.603,117.003 ; U$9001.69@82.629,116.792 v1(82.629,118.762)
NetP500_70: P500.70 U$9001.70 | length 4.7
  Component Side w0.254: P500.70@82.67,111.578 v1(82.67,113.538)
  Bottom Layer w0.254: U$9001.70@82.67,111.517 82.67,111.573 v1(82.67,113.538) ; v1(82.67,113.538) 82.67,113.894 v1(82.67,113.538)
NetP500_71: P500.71 U$9001.71 | length 2.2
  Component Side w0.254: v1@82.115,115.648 P500.71
  Bottom Layer w0.254: v1(82.11,115.642) U$9001.71@82.11,116.632
NetP500_72: P500.72 U$9001.72 | length 2.4
  Component Side w0.254: v1@82.115,110.392 P500.72
  Bottom Layer w0.254: v1(82.086,110.363) 82.086,111.524 U$9001.72@82.135,111.573
NetP500_73: P500.73 U$9001.73 | length 2.4
  Component Side w0.254: P500.73 v1@81.615,117.971
  Bottom Layer w0.254: U$9001.73@81.595,116.79 81.645,116.839 v1(81.645,118)
NetP500_74: P500.74 U$9001.74 | length 2.2
  Component Side w0.254: P500.74 v1@81.615,112.715
  Bottom Layer w0.254: U$9001.74@81.621,111.731 v1(81.621,112.721)
NetP500_75: P500.75 U$9001.75 | length 4.7
  Component Side w0.254: v1(81.06,114.825) P500.75@81.06,116.785
  Bottom Layer w0.254: U$9001.75@81.06,116.847 81.06,116.79 v1(81.06,114.825) ; v1(81.06,114.825) 81.06,114.47 v1(81.06,114.825)
NetP500_76: P500.76 U$9001.76 | length 4.1
  Component Side w0.254: v1(81.102,109.601) P500.76@81.102,111.51
  Bottom Layer w0.254: v1(81.102,109.601) U$9001.76@81.102,111.572 ; U$9001.76@81.128,111.361 U$9001.76@81.128,111.572
NetP500_77: P500.77 U$9001.77 | length 4.1
  Component Side w0.254: P500.77@80.629,116.853 v1(80.629,118.762)
  Bottom Layer w0.254: U$9001.77@80.603,116.792 U$9001.77@80.603,117.003 ; U$9001.77@80.629,116.792 v1(80.629,118.762)
NetP500_78: P500.78 U$9001.78 | length 4.7
  Component Side w0.254: P500.78@80.67,111.578 v1(80.67,113.538)
  Bottom Layer w0.254: U$9001.78@80.67,111.517 80.67,111.573 v1(80.67,113.538) ; v1(80.67,113.538) 80.67,113.894 v1(80.67,113.538)
NetP500_79: P500.79 U$9001.79 | length 2.2
  Component Side w0.254: v1@80.115,115.648 P500.79
  Bottom Layer w0.254: v1(80.11,115.642) U$9001.79@80.11,116.632
NetP500_80: P500.80 U$9001.80 | length 2.4
  Component Side w0.254: v1@80.115,110.392 P500.80
  Bottom Layer w0.254: v1(80.086,110.363) 80.086,111.524 U$9001.80
pads on no net: JP400.1 JP401.1

## Polygon pours and split planes (outlines as drawn)
GND on Component Side "gnd" (solid, remove dead copper, pour order 24): 74.95,174.854 177.114,174.854 177.114,109.245 206.451,79.908 168.859,42.316 164.719,42.316 83.515,42.316 75.032,33.833 36.744,72.12
GND on Bottom Layer "gnd" (solid, remove dead copper, pour order 23): 54.737,181.254 59.817,176.174 176.936,176.174 176.936,110.566 206.273,81.229 168.681,43.637 164.541,43.637 83.337,43.637 74.854,35.154 26.899,83.109 18.237,83.109

## Keep-outs
Keep-Out Layer:
  lines w0.076: 102.54,62.543 103.844,62.543 104.851,63.551 104.851,81.305 105.385,81.839 116.154,81.839 116.84,81.153 116.84,62.569 118.237,61.172 ; 102.542,62.543 cw(c115.037,115.037) 118.236,61.172 ; 118.236,61.172 118.237,61.172

## Silkscreen, mask and mechanical layers (free items; w line width, h text height)
Top Overlay:
  rectangle: 103.022,107.086 110.058,122.657
  rectangle: 69.901,107.391 76.683,120.498
  region: 69.926,108.1 110.058,108.1 110.058,102.822 110.002,101.971 109.836,101.135 109.562,100.328 109.185,99.564 108.712,98.855 108.15,98.215 107.509,97.653 106.8,97.179 106.036,96.802 105.229,96.528 104.393,96.362 103.542,96.306 76.442,96.306 75.592,96.362 74.756,96.528 73.949,96.802 73.184,97.179 72.476,97.653 71.835,98.215 71.273,98.855 70.799,99.564 70.422,100.328 70.149,101.135 69.982,101.971 69.926,102.822
  region: 110.058,119.99 69.926,119.99 69.926,129.958 69.982,130.809 70.148,131.645 70.422,132.452 70.799,133.216 71.273,133.925 71.835,134.566 72.476,135.128 73.184,135.601 73.949,135.978 74.756,136.252 75.592,136.418 76.442,136.474 103.542,136.474 104.393,136.418 105.229,136.252 106.036,135.978 106.8,135.601 107.509,135.128 108.15,134.566 108.712,133.925 109.185,133.216 109.562,132.452 109.836,131.645 110.002,130.809 110.058,129.958
  lines w0.1: 109.319,101.702 109.319,131.699
  lines w0.254: 70.819,101.219 70.819,132.207
  text "GOLDEN" at 136.373,138.1 h1.52
  text "APM Type-A Connector" at 82.347,118.516 h0.7
  text "DUT" at 74.879,93.878 h1.52
Mechanical 1:
  lines w0.254: 82.039,147.961 82.039,147.961 ; 102.54,62.543 103.844,62.543 104.851,63.551 104.851,81.305 105.385,81.839 116.154,81.839 116.84,81.153 116.84,62.569 118.237,61.172 ccw(c115.037,115.037) 102.542,62.543

## Text inside footprints (layer, text, board x,y; h text height)
P500: Top Overlay "Male" at 85.805,113.153 h1.97
U$9001: Bottom Overlay "Female" at 89.889,112.903 h1.97